# EAGLE board M_3x4._v3 (EAGLE 9.6.2), part 1 of 2
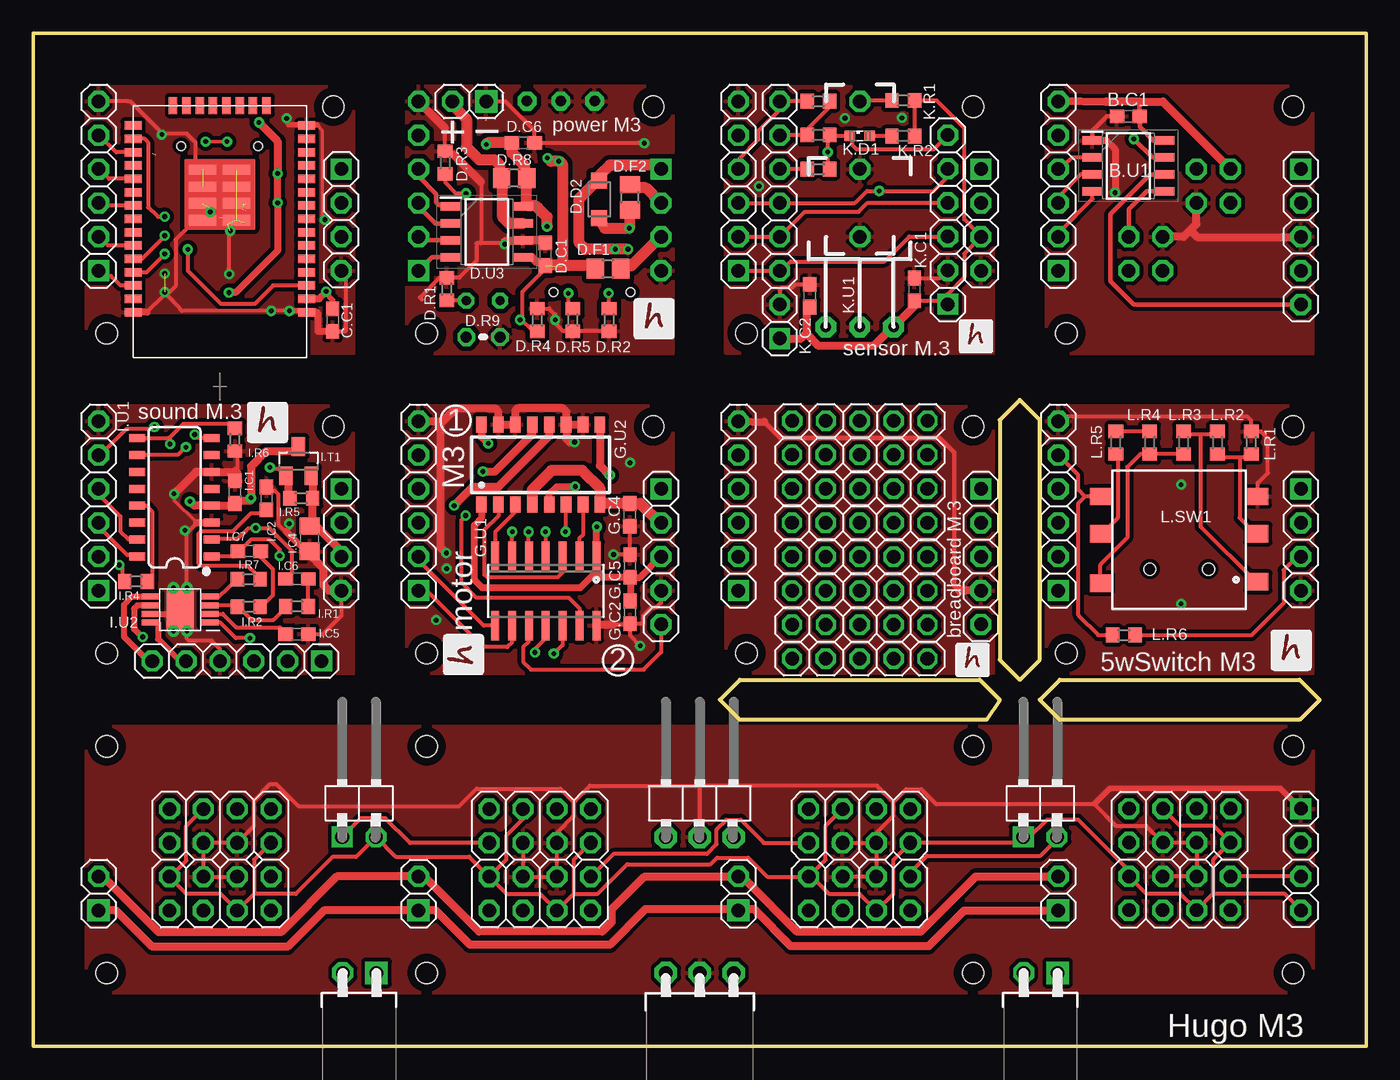
[diagram p0: board, top side]
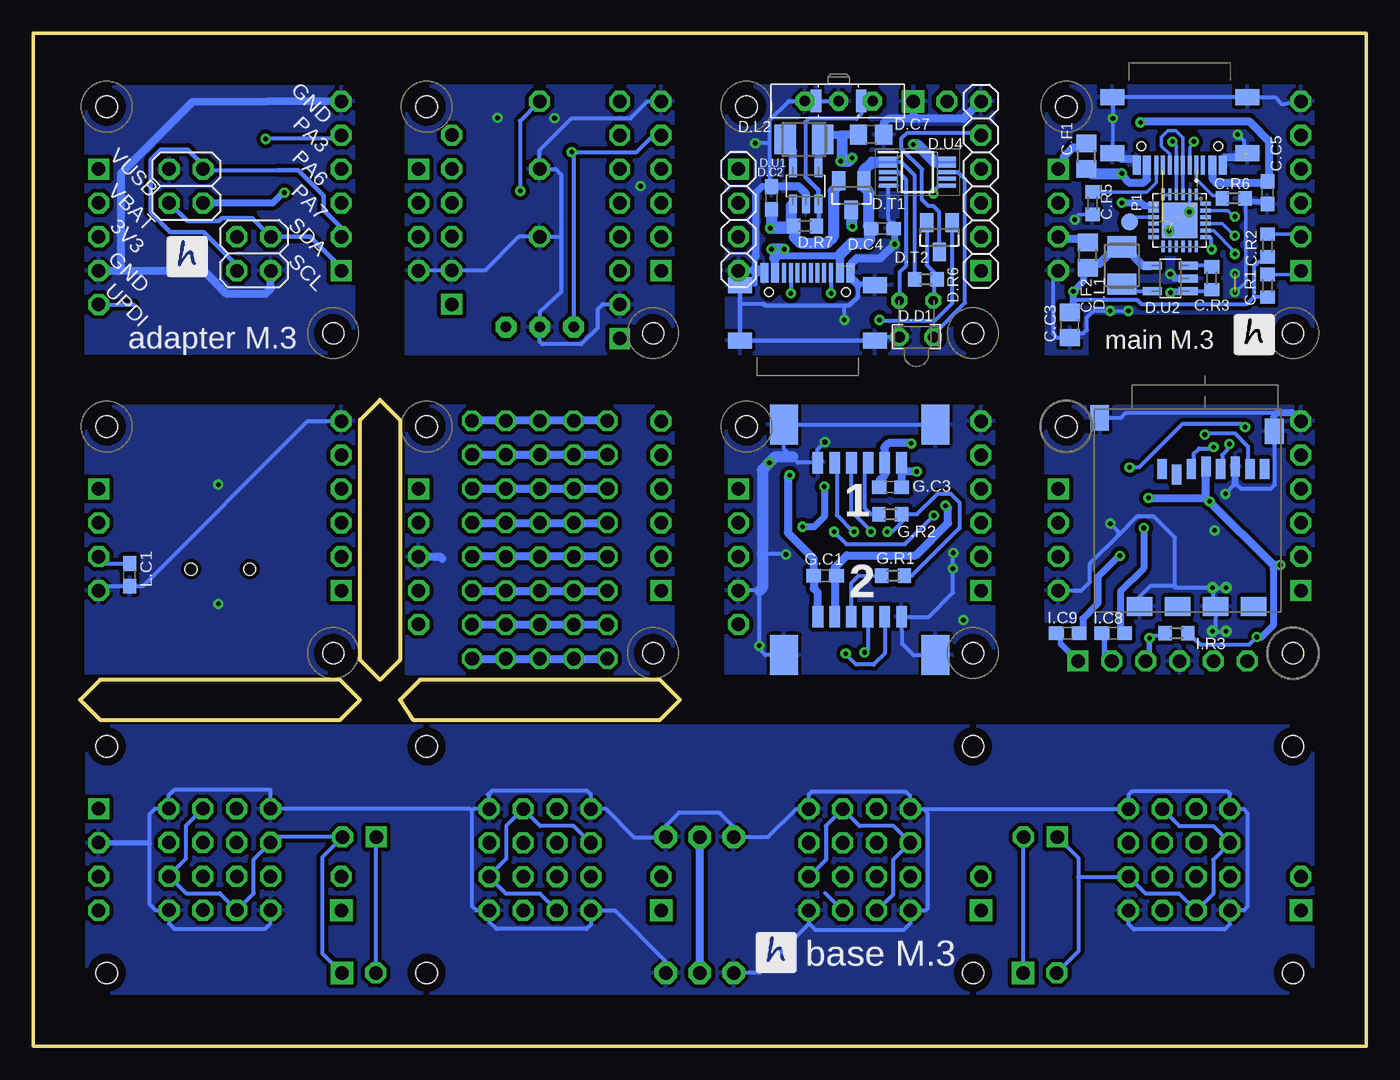
[diagram p1: board, bottom side, seen from below]

Size 100 x 76 mm. Coordinates in mm from the lower left corner, seen from the top.
Outline: 0,0 100,0 100,76 0,76 0,0
Copper layers (1*16): Top 0.035mm / dielectric 1.5mm / Bottom 0.035mm
Design rules "default *": minimum track width 10mil, minimum drill 0.35mm, track to track 6mil, track to pad 6mil, pad to pad 6mil, via to via 6mil, smd to smd 6mil, copper to edge 0mil, drill to drill 15mil, minimum pad ring 10mil, minimum via ring 8mil, stop-mask expansion 4mil, vias tented up to drill 0mil, thermal gap 10mil
Holes 1.6 mm at 94.5,5.5 94.5,22.5 5.5,22.5 5.5,5.5 70.5,22.5 70.5,5.5 29.5,22.5 29.5,5.5 77.5,53.5 94.5,70.5 70.5,70.5 53.5,53.5 77.5,29.5 94.5,46.5 70.5,46.5 53.5,29.5 5.5,29.5 22.5,46.5 29.5,29.5 46.5,46.5 70.5,70.5 53.5,53.5 77.5,29.5 94.5,46.5 5.5,53.5 22.5,70.5 29.5,53.5 46.5,70.5
tRestrict: area 4.5,21.5 to 6.5,23.5; area 4.5,4.5 to 6.5,6.5; area 93.5,21.5 to 95.5,23.5; area 93.5,4.5 to 95.5,6.5; area 69.5,21.5 to 71.5,23.5; area 69.5,4.5 to 71.5,6.5; area 28.5,4.5 to 30.5,6.5; area 28.5,21.5 to 30.5,23.5; area 93.5,69.5 to 95.5,71.5; area 76.5,52.5 to 78.5,54.5; area 69.5,45.5 to 71.5,47.5; area 52.5,28.5 to 54.5,30.5; 12 more areas
bRestrict: area 4.5,4.5 to 6.5,6.5; area 4.5,21.5 to 6.5,23.5; area 93.5,4.5 to 95.5,6.5; area 93.5,21.5 to 95.5,23.5; area 69.5,21.5 to 71.5,23.5; area 69.5,4.5 to 71.5,6.5; area 28.5,4.5 to 30.5,6.5; area 28.5,21.5 to 30.5,23.5; area 93.5,69.5 to 95.5,71.5; area 76.5,52.5 to 78.5,54.5; area 52.5,28.5 to 54.5,30.5; area 69.5,45.5 to 71.5,47.5; 12 more areas
Milling: 18 lines

## Footprints (pad centres in the part's own frame; a part is rotated, then mirrored left to right if it is on the bottom)
2X04 = drill 1.016 pad 1.575 octagon: 1 -3.81,-1.27; 2 -3.81,1.27; 3 -1.27,-1.27; 4 -1.27,1.27; 5 1.27,-1.27; 6 1.27,1.27; 7 3.81,-1.27; 8 3.81,1.27
1X02/90 = drill 1.016 pad 1.575 square: 1 -1.27,-3.81 | drill 1.016 pad 1.575 octagon: 2 1.27,-3.81
1X03/90 = drill 1.016 pad 1.676 octagon: 1 -2.54,-3.81; 2 0,-3.81; 3 2.54,-3.81
1X03/90F = drill 1.016 pad 1.676 octagon: 1 -2.54,0; 2 0,0; 3 2.54,0
1X02/90F = drill 1.016 pad 1.676 square: 1 -1.31,0 | drill 1.016 pad 1.575 octagon: 2 1.23,0
1X04 = drill 1.016 pad 1.575 square: 1 -3.81,0 | drill 1.016 pad 1.575 octagon: 2 -1.27,0; 3 1.27,0; 4 3.81,0
C0603 = smd 1.1 x 1: 1 -0.85,0; 2 0.85,0
1X06 = drill 1.016 pad 1.575 square: 1 -6.35,0 | drill 1.016 pad 1.575 octagon: 2 -3.81,0; 3 -1.27,0; 4 1.27,0; 5 3.81,0; 6 6.35,0
2X02 = drill 1.016 pad 1.575 octagon: 1 -1.27,-1.27; 2 -1.27,1.27; 3 1.27,-1.27; 4 1.27,1.27
1X05 = drill 1.016 pad 1.575 square: 1 -5.08,0 | drill 1.016 pad 1.575 octagon: 2 -2.54,0; 3 0,0; 4 2.54,0; 5 5.08,0
SOIC127P600X175-8N = smd 1.5 x 0.65: 1 -2.7,1.905; 2 -2.7,0.635; 3 -2.7,-0.635; 4 -2.7,-1.905; 5 2.7,-1.905; 6 2.7,-0.635; 7 2.7,0.635; 8 2.7,1.905
C0805 = smd 1.3 x 1.5: 1 -0.95,0; 2 0.95,0
R0805 = smd 1.3 x 1.5: 1 -0.95,0; 2 0.95,0
R0603 = smd 1 x 1.1: 1 -0.85,0; 2 0.85,0
TTGO-MICRO-32 = smd 1.27 x 0.635: 3V3 -6.5,5; EN -6.5,4; GND1 -6.5,6; GND2 -6.5,-8; GND3 6.5,6; IO0 6.5,-7; IO2 6.5,-8; IO4 6.5,-6; IO5 6.5,-3; IO12 -6.5,-7; IO14 -6.5,-6; IO16 6.5,-5; IO17 6.5,-4; IO18 6.5,-2; IO19 6.5,-1; IO21 6.5,1; IO22 6.5,4; IO23 6.5,5; IO25 -6.5,-3; IO26 -6.5,-4; IO27 -6.5,-5; IO32 -6.5,-1; IO33 -6.5,-2; IO34 -6.5,1; IO35 -6.5,0; NC 6.5,0; RXD0 6.5,2; TXD0 6.5,3; VN -6.5,2; VP -6.5,3 | smd 0.635 x 1.27: CLK 0.5,-9.5; CMD -0.5,-9.5; IO13 -3.5,-9.5; IO15 3.5,-9.5; SD0 1.5,-9.5; SD1 2.5,-9.5; SD2 -2.5,-9.5; SD3 -1.5,-9.5 | smd 2.032 x 0.762: GND4 -1.27,-0.889; GND5 1.27,-0.889; GND6 -1.27,-2.159; GND7 1.27,-2.159; GND8 -1.27,-3.429; GND9 -1.27,-4.699; GND10 1.27,-3.429; GND11 1.27,-4.699
LED_1.8 = drill 0.7 octagon: 1 -1.27,-0.4; 2 1.27,-0.4
SHOTKY_2.8 = smd 1.2 x 1.2: A -1.4,0; K 1.4,0
L3230M = smd 1.6 x 2.2: 1 -1.4,0; 2 1.4,0
1X02 = drill 1.016 pad 1.676 square: 1 -1.27,0 | drill 1.016 pad 1.575 octagon: 2 1.27,0
SWITCH = drill 0.8 pad 1.422 octagon: P$1 -2.54,0; P$2 0,0; P$3 2.54,0 | smd 0.8 x 1.7: P$4 -1.7,0; P$5 1.7,0
THERM = drill 0.813 octagon: 1 -1.27,0; 2 1.27,0
SOT23 = smd 1 x 1.4: D 0,1.1; G -0.95,-1.1; S 0.95,-1.1
SOT32-5 = smd 0.6 x 1.4: BP 0.95,1.35; GND 0,-1.35; SHDN 0.95,-1.35; VIN -0.95,-1.35; VOUT -0.95,1.35
SOIC127P600X175-8N' = smd 1.528 x 0.65: 1 -2.711,1.905; 2 -2.711,0.635; 3 -2.711,-0.635; 4 -2.711,-1.905; 5 2.711,-1.905; 6 2.711,-0.635; 7 2.711,0.635; 8 2.711,1.905
SOP50P490X110-10N = smd 1.4 x 0.3: 1 -2.2,1; 2 -2.2,0.5; 3 -2.2,0; 4 -2.2,-0.5; 5 -2.2,-1; 6 2.2,-1; 7 2.2,-0.5; 8 2.2,0; 9 2.2,0.5; 10 2.2,1
A1250WR-6 = smd 0.8 x 1.6: 1 -3.128,2.54; 2 -1.878,2.54; 3 -0.628,2.54; 4 0.622,2.54; 5 1.872,2.54; 6 3.142,2.54 | smd 2.1 x 3: $1 -5.678,-0.34; $2 5.682,-0.34
SO14 = smd 0.6 x 2.2: 1 -3.81,-2.6; 2 -2.54,-2.6; 3 -1.27,-2.6; 4 0,-2.6; 5 1.27,-2.6; 6 2.54,-2.6; 7 3.81,-2.6; 8 3.81,2.6; 9 2.54,2.6; 10 1.27,2.6; 11 0,2.6; 12 -1.27,2.6; 13 -2.54,2.6; 14 -3.81,2.6
SOP16 = smd 0.8 x 1.2: 1 -4.445,-3; 2 -3.175,-3; 3 -1.905,-3; 4 -0.635,-3; 5 0.635,-3; 6 1.905,-3; 7 3.175,-3; 8 4.445,-3; 9 4.445,3; 10 3.175,3; 11 1.905,3; 12 0.635,3; 13 -0.635,3; 14 -1.905,3; 15 -3.175,3; 16 -4.445,3
SO16 = smd 0.6 x 1.2: 1 -4.445,-2.8; 2 -3.175,-2.8; 3 -1.905,-2.8; 4 -0.635,-2.8; 5 0.635,-2.8; 6 1.905,-2.8; 7 3.175,-2.8; 8 4.445,-2.8; 9 4.445,2.8; 10 3.175,2.8; 11 1.905,2.8; 12 0.635,2.8; 13 -0.635,2.8; 14 -1.905,2.8; 15 -3.175,2.8; 16 -4.445,2.8
MSOP-POWERPAD-8 = smd 1.4 x 0.45: 1 -2.184,0.959; 2 -2.184,0.309; 3 -2.184,-0.341; 4 -2.184,-0.991; 5 2.216,-0.991; 6 2.216,-0.341; 7 2.216,0.309; 8 2.216,0.959 | smd 2 x 3: 9 0.016,-0.016 | drill 0.35: P$10 -0.484,-1.651; P$11 0.516,-1.651; P$12 0.516,1.619; P$13 -0.484,1.619
1X08 = drill 1.016 pad 1.575 square: 1 -8.89,0 | drill 1.016 pad 1.575 octagon: 2 -6.35,0; 3 -3.81,0; 4 -1.27,0; 5 1.27,0; 6 3.81,0; 7 6.35,0; 8 8.89,0
SML0603 = smd 0.8 x 0.8: A 0.75,0; C -0.75,0
IR_RECEIVER = drill 0.8 pad 1.575 octagon: GND 0,0; OUT -2.54,0; VCC 2.54,0
5_WAY_SWITCH = smd 1.6 x 1.3: 1 -6,3; 2 -6,0.2; 3 -6,-3.5; 4 5.8,3; 5 5.8,0.2; 6 5.8,-3.4 | hole 0.9: 2.1,-2.45; -2.3,-2.45
B1,27 = smd 1.27 x 1.27: TP 0,0
QFN50P400X400X80-25N = smd 0.81 x 0.26: 1 -1.955,1.25; 2 -1.955,0.75; 3 -1.955,0.25; 4 -1.955,-0.25; 5 -1.955,-0.75; 6 -1.955,-1.25; 13 1.955,-1.25; 14 1.955,-0.75; 15 1.955,-0.25; 16 1.955,0.25; 17 1.955,0.75; 18 1.955,1.25 | smd 0.26 x 0.81: 7 -1.25,-1.955; 8 -0.75,-1.955; 9 -0.25,-1.955; 10 0.25,-1.955; 11 0.75,-1.955; 12 1.25,-1.955; 19 1.25,1.955; 20 0.75,1.955; 21 0.25,1.955; 22 -0.25,1.955; 23 -0.75,1.955; 24 -1.25,1.955 | smd 2.68 x 2.68: 25 0,0
USB-C = smd 0.6 x 1.45: A1B12 -3.235,3.825; A4B9 -2.46,3.825; B1A12 3.215,3.825; B4A9 2.44,3.825 | smd 0.3 x 1.45: A5 -1.26,3.825; A6 -0.26,3.825; A7 0.24,3.825; A8 1.24,3.825; B5 1.74,3.825; B6 0.74,3.825; B7 -0.76,3.825; B8 -1.76,3.825 | smd 1.8 x 1.2: SH1 -5.08,2.91; SH2 -5.08,-1.27; SH3 5.06,-1.27; SH4 5.06,2.91 | hole 0.65: 2.88,2.38; -2.9,2.38
BUTTON-SWITCH = drill 1.016 pad 1.575 octagon: P$1 0,0; P$2 5.08,0; P$3 10.16,0
MOCRO_SD = smd 0.7 x 1.5: 1 8.92,-10.7; 2 7.82,-10.3; 3 6.72,-10.7; 4 5.62,-10.9; 5 4.52,-10.7; 6 3.42,-10.9; 7 2.32,-10.7; 8 1.22,-10.7 | smd 1.9 x 1.4: G1 4.9,-0.4; G2 10.6,-0.4; S1 2.05,-0.4; S2 7.75,-0.4 | smd 1.4 x 1.9: G3 0.5,-13.55; G4 13.6,-14.55
1X5_AUTO = drill 1.016 octagon: 1 -5.08,0; 2 -2.54,0; 3 0,0; 4 2.54,0; 5 5.08,0

## Placement (x,y rotation side)
A.J1  [2X04]  14.02,16.53 180 top
A.J2  [2X04]  14.02,11.45 180 top
A.J3  [2X04]  38.01,16.53 180 top
A.J4  [2X04]  38.01,11.45 180 top
A.J5  [2X04]  61.98,16.53 180 top
A.J6  [2X04]  61.98,11.45 180 top
A.J7  [1X02/90]  24.44,19.5 0 top
A.J8  [1X03/90]  50,19.5 0 top
A.J9  [1X03/90F]  50,5.5 180 top
A.J10  [1X02/90F]  24.44,5.5 180 top
A.J11  [2X04]  86.01,11.47 0 top
A.J12  [2X04]  86.02,16.55 0 top
A.J13  [1X02/90F]  75.54,5.5 180 top
A.J14  [1X02/90]  75.54,19.5 0 top
A.J15  [1X04]  95.1,14 270 top
B.C1  100n  [C0603]  82.15,69.76 0 top
B.J2  [1X06]  76.9,64.54 90 top
B.J4  [2X02]  88.54,64.54 270 bottom
B.J5  [1X05]  95.1,60.73 270 top
B.U1  AT412  [SOIC127P600X175-8N]  82.16,66.05 0 top
C.C1  100n  [C0603]  22.46,54.48 270 top
C.C3  22u  [C0805]  22.25,54.12 270 bottom
C.C5  1u  [C0603]  7.41,64.05 90 bottom
C.F1  0.5A  [R0805]  20.98,66.78 90 bottom
C.F2  0.5A  [R0805]  20.88,59.35 90 bottom
C.J2  [1X06]  4.9,64.54 90 top
C.R1  2k2  [R0603]  7.41,57.06 270 bottom
C.R2  2k2  [R0603]  7.41,60.08 270 bottom
C.R3  39k  [R0603]  11.58,57.62 270 bottom
C.R5  5K1  [R0603]  20.53,63.26 90 bottom
C.R6  5k1  [R0603]  9.95,63.61 180 bottom
C.U1  TTGO-MICRO-32  [TTGO-MICRO-32]  13.99,61.08 180 top
D.C1  100n  [C0603]  38.42,59.42 270 top
D.C2  4u7  [C0603]  44.62,63.64 270 bottom
D.C4  4u7  [C0603]  36.3,61.35 180 bottom
D.C6  4u7  [C0603]  36.75,67.79 180 top
D.C7  10u  [C0805]  37.14,68.4 180 bottom
D.D1  LED_1.8_FLIPPED  [LED_1.8]  33.75,55.55 180 bottom
D.D2  SHOTKY_2.8  [SHOTKY_2.8]  42.46,63.54 270 top
D.F1  0.5A  [R0805]  43.11,58.35 0 top
D.F2  1.1A  [R0805]  44.76,63.7 90 top
D.J2  [1X06]  28.9,64.54 90 bottom
D.J3  [1X04]  47.1,62 270 bottom
D.L1  2u2  [L3230M]  18.33,58.59 90 bottom
D.L2  2u2  [L3230M]  42.18,68.04 0 bottom
D.LIPOL  [1X02]  32.71,70.89 180 top
D.ON/OFF/RESET  SWITCH  [SWITCH]  39.58,70.92 0 bottom
D.R1  4k7  [R0603]  31.02,56.81 270 top
D.R2  5k1  [R0603]  43.2,54.5 270 top
D.R3  I=1/R (4k7 for 213mA, 2k2 for455mA )  [R0603]  30.9,66.31 270 top
D.R4  100k  [R0603]  37.81,54.5 90 top
D.R5  5k1  [R0603]  40.46,54.5 270 top
D.R6  3k3  [R0603]  33.04,57.55 180 bottom
D.R7  390k  [R0603]  42.1,61.53 0 bottom
D.R8  0.1  [R0805]  36.08,65.14 180 top
D.R9  TERM_10K  [THERM]  33.75,53.21 180 top
D.T1  FDV304  [SOT23]  38.63,63.84 180 bottom
D.T2  FDV304  [SOT23]  32.02,60.69 180 bottom
D.U1  LM3671_3.3  [SOT32-5]  42.04,64.55 0 bottom
D.U2  LM3671_3.3  [SOT32-5]  14.7,57.61 90 bottom
D.U3  INA219AIDR  [SOIC127P600X175-8N']  34.03,61.1 0 top
D.U4  MCP73833-AMI_UN  [SOP50P490X110-10N]  33.67,65.59 0 bottom
G.C1  100n  [C0603]  40.6,35.3 180 bottom
G.C2  100n  [C0603]  44.77,32.55 90 top
G.C3  100n  [C0603]  35.7,41.95 0 bottom
G.C4  4u7  [C0603]  44.75,39.87 90 top
G.C5  4u7  [C0603]  44.77,36.04 270 top
G.J1  [1X06]  28.9,40.54 90 top
G.J2  [1X05]  47.1,36.73 270 top
G.J3  A1250WR-6  [A1250WR-6]  38,29.68 0 bottom
G.J4  [1X06]  76.9,40.54 90 top
G.J5  [1X04]  95.1,38 270 top
G.MOTO1  A1250WR-6  [A1250WR-6]  38,46.32 180 bottom
G.R1  100  [R0603]  35.49,35.3 0 bottom
G.R2  100  [R0603]  35.7,39.92 0 bottom
G.U1  AT414  [SO14]  38.45,34.15 180 top
G.U2  MX1508  [SOP16]  38.07,43.63 0 top
H.J4  [1X06]  15.27,28.9 180 top
I.C1  100n  [C0603]  15.13,41.56 90 top
I.C2  100n  [C0603]  17.5,41.11 270 top
I.C4  10u (22u)  [C0805]  20.73,38.08 90 top
I.C5  220n  [C0603]  19.78,30.92 180 top
I.C6  100n  [C0603]  19.78,35.06 0 top
I.C7  100n  [C0603]  16.2,37.15 0 top
I.C8  100n  [C0603]  18.98,31 180 bottom
I.C9  100n  [C0603]  22.4,31 180 bottom
I.J1  [1X04]  23.1,38 270 top
I.J2  [1X06]  4.9,40.54 90 top
I.J3  [1X04]  71.1,62 270 top
I.R1  10k  [R0603]  19.78,33 180 top
I.R2  10k  [R0603]  16.17,32.97 180 top
I.R3  10k  [R0603]  14.23,31 0 bottom
I.R4  10k  [R0603]  7.71,34.87 0 top
I.R5  100k  [R0603]  20.1,41.12 0 top
I.R6  1k5  [R0603]  15.13,45.5 90 top
I.R7  10k  [R0603]  16.17,35.05 180 top
I.T1  [SOT23]  19.9,43.89 0 top
I.U1  WT2003S  [SO16]  10.6,41.19 90 top
I.U2  TPA6211  [MSOP-POWERPAD-8]  11.03,32.75 180 top
JB3  [2X02]  83.46,59.46 270 bottom
JP1  [1X02]  4.9,11.46 90 top
JP2  [1X02]  28.9,11.46 90 top
JP3  [1X02]  52.9,11.46 90 top
JP4  [1X02]  76.9,11.46 90 top
JP5  [1X04]  23.1,62 270 top
JP6  [1X06]  52.9,64.54 90 top
JP7  [1X08]  56,62 90 top
JP8  [1X06]  68.61,62.02 90 top
JP9  [1X06]  52.9,40.54 90 top
JP11  [1X05]  71.1,36.73 270 top
K.C1  [C0603]  66.11,56.78 90 top
K.C2  [C0603]  58.26,56.3 90 top
K.D1  [SML0603]  62,68.29 0 top
K.R1  100K  [R0603]  65.27,70.96 180 top
K.R2  180R  [R0603]  65.27,68.29 180 top
K.R3  0R  [R0603]  58.9,68.37 180 top
K.R4  0R  [R0603]  58.9,65.8 180 top
K.R5  0R  [R0603]  58.9,70.91 0 top
K.U1  VS1838B  [IR_RECEIVER]  62,53.96 0 top
L.C1  100n  [C0603]  92.77,35.37 90 bottom
L.R1  1k  [R0603]  91.38,45.28 90 top
L.R2  1k  [R0603]  88.83,45.28 270 top
L.R3  2k2  [R0603]  86.3,45.28 90 top
L.R4  2k2  [R0603]  83.75,45.28 270 top
L.R5  2k2  [R0603]  81.22,45.28 270 top
L.R6  2k2  [R0603]  81.82,30.85 0 top
L.SW1  5_WAY_SWITCH  [5_WAY_SWITCH]  86.07,38.24 0 top
P1  TPB1,27  [B1,27]  17.74,61.87 0 bottom
U1  CP2104-F03-GM  [QFN50P400X400X80-25N]  13.99,61.96 270 bottom
U$1  USB-C  [USB-C]  14,69.93 180 bottom
U$2  USB-C  [USB-C]  41.91,54.2 0 bottom
U$3  BUTTON-SWITCH  [BUTTON-SWITCH]  62.02,60.73 90 top
U$4  MICRO_SD  [MOCRO_SD]  6.4,32.6 180 bottom
U$5  PINHD-1X5_AUTO  [1X5_AUTO]  62.01,46.93 0 top
U$6  PINHD-1X5_AUTO  [1X5_AUTO]  62,44.38 0 top
U$7  PINHD-1X5_AUTO  [1X5_AUTO]  62,41.82 0 top
U$8  PINHD-1X5_AUTO  [1X5_AUTO]  62,39.27 0 top
U$9  PINHD-1X5_AUTO  [1X5_AUTO]  62,36.73 0 top
U$10  PINHD-1X5_AUTO  [1X5_AUTO]  62,34.17 0 top
U$11  PINHD-1X5_AUTO  [1X5_AUTO]  62,31.62 0 top
U$12  PINHD-1X5_AUTO  [1X5_AUTO]  62,29.07 0 top

## Library data of the parts
A.J1-A.J15 B.J2 B.J4 B.J5 C.J2 D.J2 D.J3 D.LIPOL G.J1 G.J2 G.J4 G.J5 H.J4 I.J1-I.J3 JB3 JP1-JP9 JP11 U$5-U$12 = pinhead2
B.C1 C.C1 C.C3 C.C5 D.C1 D.C2 D.C4 D.C6 D.C7 G.C1-G.C5 I.C1 I.C2 I.C4-I.C9 K.C1 K.C2 L.C1 = rcl; SPICEPREFIX: C
B.U1 = ATTINY412-SSN; DESCRIPTION: 8-bit Microcontrollers - MCU 20MHz, 4KB, SOIC8, Ind 105C, Green, Tube; HEIGHT: 1.75mm; MANUFACTURER_NAME: Microchip; MANUFACTURER_PART_NUMBER: ATTINY412-SSN; MOUSER_PART_NUMBER: 579-ATTINY412-SSN; MOUSER_PRICE-STOCK: https://www.mouser.co.uk/ProductDetail/Microchip-Technology/ATTINY412-SSN?qs=3HJ2avRr9PItQG9ZsCamPQ%3D%3D
C.F1 C.F2 C.R1-C.R3 C.R5 C.R6 D.F1 D.F2 D.R1-D.R8 G.R1 G.R2 I.R1-I.R7 K.R1-K.R5 L.R1-L.R6 = rcl; SPICEPREFIX: R
C.U1 D.D1 D.D2 D.ON/OFF/RESET D.R9 G.J3 G.MOTO1 G.U2 I.U2 K.U1 L.SW1 U$1-U$4 = hugo
D.L1 D.L2 = rcl; SPICEPREFIX: L
D.T1 D.T2 D.U1 D.U2 I.T1 = !stavebnice03
D.U3 = SamacSys_Parts; DESCRIPTION: 26-V, Bidirectional, Zero-Drift, High-Side, I2C Out Current/Power Monitor; HEIGHT: 1.75mm; MANUFACTURER_NAME: Texas Instruments; MANUFACTURER_PART_NUMBER: INA219AIDR; MOUSER_PART_NUMBER: 595-INA219AIDR; MOUSER_PRICE-STOCK: https://www.mouser.co.uk/ProductDetail/Texas-Instruments/INA219AIDR?qs=XGzIaZb%2FFYIE5YcOHTnKDA%3D%3D
D.U4 = SamacSys_Parts; DESCRIPTION: Microchip MCP73833-AMI/UN, Battery Charge Controller Lithium-Ion, Lithium-Polymer, 10-Pin MSOP; HEIGHT: 1.1mm; MANUFACTURER_NAME: Microchip; MANUFACTURER_PART_NUMBER: MCP73833-AMI/UN; MOUSER_PART_NUMBER: 579-MCP73833-AMI/UN; MOUSER_PRICE-STOCK: https://www.mouser.co.uk/ProductDetail/Microchip-Technology/MCP73833-AMI-UN?qs=Fxu3fLyJv8fd%2FGnsUSC9lg%3D%3D
G.U1 = atmel
I.U1 = WT2003S
K.D1 = led
P1 = testpad
U1 = CP2104; AVAILABILITY: Unavailable; DESCRIPTION: USB Bridge, USB to UART USB 2.0 UART Interface 24-QFN (4x4); MF: Silicon Labs; MP: CP2104; PACKAGE: QFN-24 Silicon Labs; PRICE: None

## Nets
3V3: B.C1.1 B.J4.4 B.J5.3 B.U1.1 JB3.1
3V3F: D.F1.2 D.J3.3
_FOTOA1_: G.MOTO1.5 G.U1.4
_FOTOA2_: G.J3.5 G.U1.12
FOTOB1: G.MOTO1.4 G.U1.5
FOTOB2: G.J3.4 G.U1.11
GND: A.J1.1 A.J1.7 A.J2.2 A.J2.8 A.J3.1 A.J3.7 A.J4.2 A.J4.8 A.J5.1 A.J5.7 A.J6.2 A.J6.8 A.J8.1 A.J8.3 A.J9.1 A.J9.3 A.J11.1 A.J11.7 A.J12.2 A.J12.8 A.J15.2
GND1: C.C1.2 C.C3.2 C.C5.1 C.J2.6 C.R5.1 C.R6.1 C.U1.GND1 C.U1.GND2 C.U1.GND3 C.U1.GND4 C.U1.GND5 C.U1.GND6 C.U1.GND7 C.U1.GND8 C.U1.GND9 C.U1.GND10 C.U1.GND11 D.U2.GND JP5.4 U1.2 U1.25 U$1.A1B12 U$1.B1A12 U$1.SH1 U$1.SH2 U$1.SH3 U$1.SH4
GND2: D.C1.1 D.C2.1 D.C4.1 D.C6.1 D.C7.1 D.J2.6 D.J3.4 D.LIPOL.1 D.ON/OFF/RESET.P$1 D.ON/OFF/RESET.P$2 D.ON/OFF/RESET.P$4 D.R1.1 D.R2.2 D.R3.1 D.R4.2 D.R5.2 D.R9.1 D.U1.GND D.U3.6 D.U4.5 U$2.A1B12 U$2.B1A12 U$2.SH1 U$2.SH2 U$2.SH3 U$2.SH4
GND3: I.J3.4 JP6.6 JP7.2 JP8.2 K.C1.2 K.C2.2 K.U1.GND U$3.P$1 U$3.P$2
GND4: H.J4.4 I.C1.2 I.C2.1 I.C4.1 I.C5.1 I.J1.4 I.J2.6 I.R6.1 I.U1.3 I.U1.6 I.U2.7 I.U2.9 I.U2.P$10 I.U2.P$11 I.U2.P$12 I.U2.P$13 U$4.6 U$4.G1 U$4.G2 U$4.G3 U$4.G4
GND5: G.C2.1 G.C4.1 G.C5.1 G.J1.6 G.J2.4 G.J3.6 G.J3.$1 G.J3.$2 G.MOTO1.6 G.MOTO1.$1 G.MOTO1.$2 G.U1.14 G.U2.10 G.U2.11 G.U2.14 G.U2.15
GND6: G.J4.6 G.J5.4 L.C1.1 L.R1.2 L.SW1.4
GND7: B.C1.2 B.J2.6 B.J4.1 B.J5.4 B.U1.8 JB3.4
GND8: JP9.6 JP11.4
IN+: D.LIPOL.2 D.R8.2 D.U3.7
IN-: D.C6.2 D.R8.1 D.T1.D D.U3.8 D.U4.9 D.U4.10
INA1: G.U1.3 G.U2.2
INA2: G.U1.13 G.U2.6
INB1: G.U1.7 G.U2.3
INB2: G.U1.2 G.U2.7
M_V: G.C4.2 G.J2.2 G.U2.4 G.U2.8
MA1: G.C3.1 G.MOTO1.2 G.U2.16
MA2: G.C1.1 G.J3.2 G.U2.12
MB1: G.C3.2 G.MOTO1.1 G.U2.13
MB2: G.C1.2 G.J3.1 G.U2.9
N$1: U1.4 U$1.A7 U$1.B7
N$2: U1.3 U$1.A6 U$1.B6
N$3: C.R6.2 U$1.A5
N$4: C.R5.2 U$1.B5
N$5: C.F2.2 JP5.3
N$6: C.F1.2 JP5.1
N$7: P1.TP U1.9
N$8: U1.5 U1.6
N$9: D.L2.1 D.U1.VOUT
N$10: D.L1.1 D.U2.VOUT
N$11: C.R3.1 D.U2.SHDN
N$12: C.J2.5 C.U1.IO4
N$13: C.J2.4 C.U1.IO17
N$14: C.J2.3 C.U1.IO18
N$15: D.ON/OFF/RESET.P$3 D.ON/OFF/RESET.P$5 D.R7.2 D.U1.SHDN
N$16: D.R5.1 U$2.B5
N$17: D.R2.1 U$2.A5
N$18: D.R3.2 D.U4.6
N$19: D.R9.2 D.U4.8
N$20: D.J2.5 D.T2.D
N$21: JP6.2 JP7.4 JP8.4
N$22: JP6.1 JP7.3 JP8.3
N$24: K.D1.A K.R2.2
N$25: JP6.5 JP8.6 K.D1.C K.R3.1 K.R4.1 K.U1.OUT
N$27: JP6.3 JP7.5 JP8.5 K.R1.2 U$3.P$3
N$28: JP6.4 JP7.8 K.R5.1
N$29: I.C6.1 I.C8.1 I.U1.2
N$30: I.C7.1 I.C9.1 I.U1.1
N$31: I.C5.2 I.U2.2
N$32: I.R1.2 I.R2.2 I.U2.3
N$33: I.C6.2 I.R1.1
N$34: I.C7.2 I.R2.1
N$35: I.C2.2 I.R7.1
N$36: I.R7.2 I.U2.4
N$37: I.R4.2 I.U1.13
N$38: I.J2.5 I.R5.1 I.T1.G
N$39: I.C4.2 I.J1.3 I.R5.2 I.T1.S
N$40: L.R1.1 L.R2.2 L.SW1.5
N$41: L.R2.1 L.R3.2 L.SW1.6
N$42: L.R3.1 L.R4.2 L.SW1.3
N$43: L.R5.2 L.SW1.2
N$44: G.J4.5 L.R6.1 L.SW1.1
N$45: L.R4.1 L.R5.1
N$46: U$5.1 U$5.2 U$5.3 U$5.4 U$5.5
N$47: U$6.1 U$6.2 U$6.3 U$6.4 U$6.5
N$48: U$7.1 U$7.2 U$7.3 U$7.4 U$7.5
N$49: U$8.1 U$8.2 U$8.3 U$8.4 U$8.5
N$50: U$9.1 U$9.2 U$9.3 U$9.4 U$9.5
N$51: U$10.1 U$10.2 U$10.3 U$10.4 U$10.5
N$52: U$11.1 U$11.2 U$11.3 U$11.4 U$11.5
N$53: U$12.1 U$12.2 U$12.3 U$12.4 U$12.5
N$54: JP7.6 K.R4.2
N$55: JP7.7 K.R3.2 K.R5.2
PA1: B.J2.5 B.U1.7
PA2: B.J2.4 B.U1.2
PA3: D.D1.1 D.R1.2 D.R6.1 D.T2.S
PA4: B.J2.3 B.U1.3
PA6: D.J2.4 D.U3.1
PA7: D.J2.3 D.U3.2
POWER1: G.MOTO1.3 G.R2.1
POWER2: G.J3.3 G.R1.1
POWER_LED: G.R1.2 G.R2.2 G.U1.6
PROG: C.U1.IO0 U1.23
RESET: C.U1.EN U1.19
RX: C.U1.TXD0 U1.20
RX1: I.J2.4 I.U1.15
SCL: A.J1.2 A.J1.5 A.J2.4 A.J2.7 A.J3.2 A.J3.5 A.J4.4 A.J4.7 A.J5.2 A.J5.5 A.J6.4 A.J6.7 A.J7.2 A.J10.1 A.J11.2 A.J11.5 A.J12.4 A.J12.7 A.J13.2 A.J14.1 A.J15.4
SCL1: C.J2.1 C.R1.1 C.U1.IO22
SCL2: D.J2.1 D.U3.4
SCL3: G.J1.1 G.U1.9
SCL4: B.J2.1 B.J4.3 B.U1.5 JB3.2
SDA: A.J1.3 A.J1.8 A.J2.1 A.J2.6 A.J3.3 A.J3.8 A.J4.1 A.J4.6 A.J5.3 A.J5.8 A.J6.1 A.J6.6 A.J7.1 A.J10.2 A.J11.3 A.J11.8 A.J12.1 A.J12.6 A.J13.1 A.J14.2 A.J15.3
SDA1: C.J2.2 C.R2.1 C.U1.IO21
SDA2: D.J2.2 D.U3.3
SDA3: G.J1.2 G.U1.8
SDA4: B.J2.2 B.J4.2 B.U1.4 JB3.3
SDCLK: I.R6.2 I.U1.9 U$4.5
SDCMD: I.U1.10 U$4.3
SDDAT: I.U1.8 U$4.7
SHTDOWN: H.J4.3 I.R3.1 I.U2.1
STAT1: D.D1.2 D.U4.3
TX: C.U1.RXD0 U1.21
TX1: I.J2.3 I.U1.16
UPDI: G.J2.5 G.U1.10
UPDI1: B.J5.5 B.U1.6
VBAT: JP1.2 JP2.2 JP3.2 JP4.2
VBATF: D.F2.2 D.J3.2
VCC: A.J1.4 A.J1.6 A.J2.3 A.J2.5 A.J3.4 A.J3.6 A.J4.3 A.J4.5 A.J5.4 A.J5.6 A.J6.3 A.J6.5 A.J8.2 A.J9.2 A.J11.4 A.J11.6 A.J12.3 A.J12.5 A.J15.1
VCC1: C.C1.1 C.C3.1 C.F2.1 C.R1.2 C.R2.2 C.U1.3V3 D.L1.2 D.U2.BP
VCC2: D.C1.2 D.C7.2 D.F1.1 D.L2.2 D.R4.1 D.T2.G D.U1.BP D.U3.5
VCC3: I.J3.3 JP7.1 JP8.1 K.C1.1 K.C2.1 K.R1.1 K.R2.1 K.U1.VCC
VCC4: I.C1.1 I.R3.2 I.R4.1 I.T1.D I.U1.4 I.U2.6 U$4.4
VCC5: G.C2.2 G.C5.2 G.J2.3 G.U1.1 G.U2.1 G.U2.5
VCC6: G.J5.3 L.C1.2 L.R6.2
VDD: JP11.3
VMOT: D.C2.2 D.D2.K D.F2.1 D.R7.1 D.T1.S D.U1.VIN
VO+: H.J4.6 I.U2.5
VO-: H.J4.5 I.U2.8
VOUTL: H.J4.1 I.C9.2
VOUTR: H.J4.2 I.C8.2
VUSB: JP1.1 JP2.1 JP3.1 JP4.1
VUSB1: C.C5.2 C.F1.1 C.R3.2 D.U2.VIN U1.7 U1.8 U$1.A4B9 U$1.B4A9
VUSB2: D.C4.2 D.D2.A D.J3.1 D.R6.2 D.T1.G D.U4.1 D.U4.2 U$2.A4B9 U$2.B4A9